# Altium PCB PCB1.PcbDoc
Units mm, origin at the board's own origin, x right, y up, seen from the top; angles counter-clockwise.
Board outline 54.1 x 52.32 mm, 2 copper layers (Top Layer, Bottom Layer); 12 components, 8 nets, 25 pads, 0 vias.
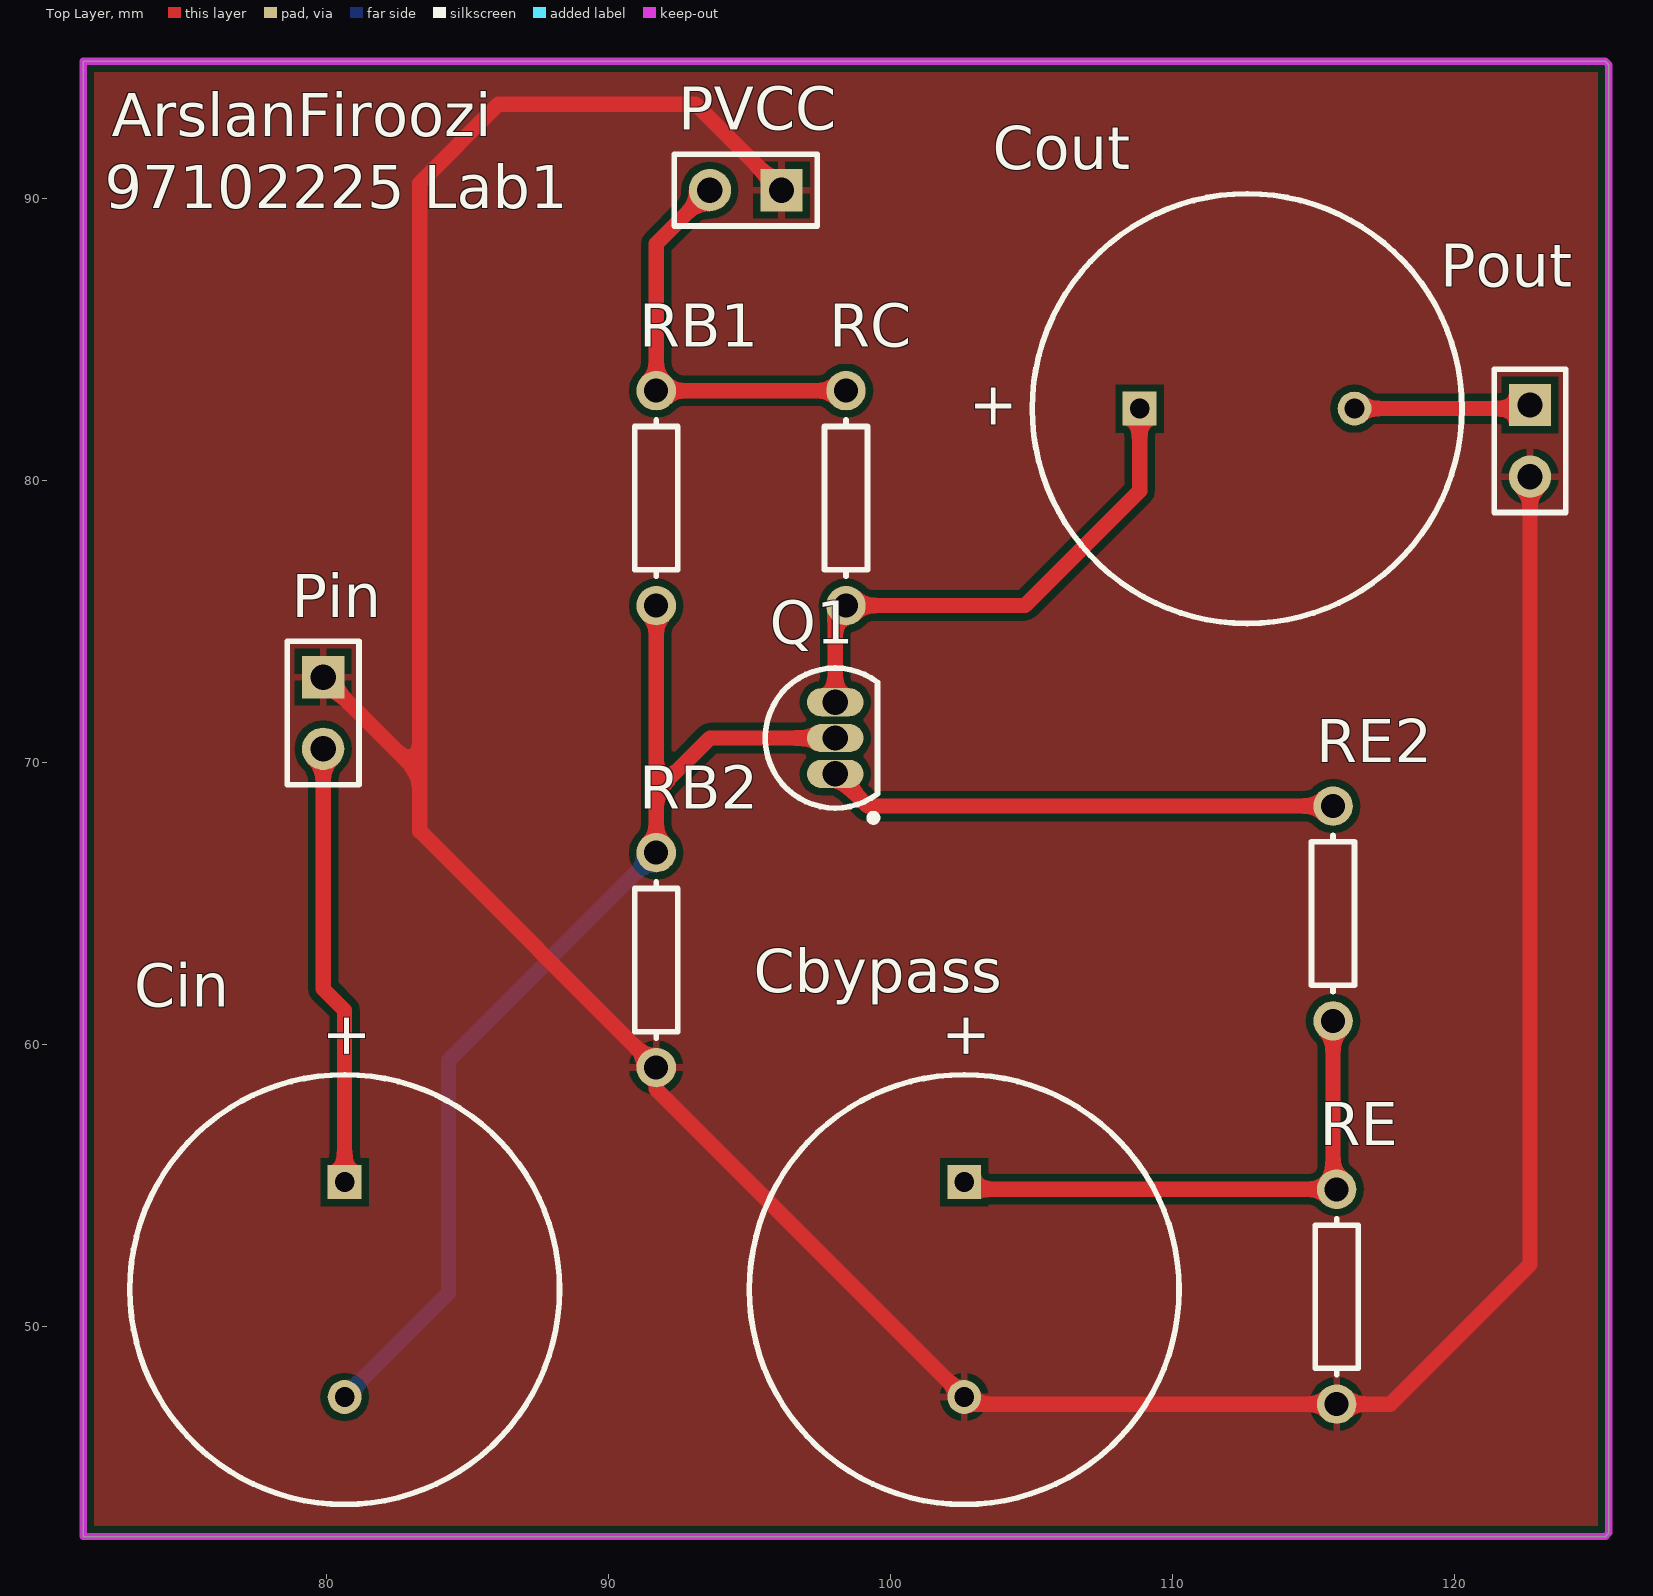
[diagram p0: Top Layer view]
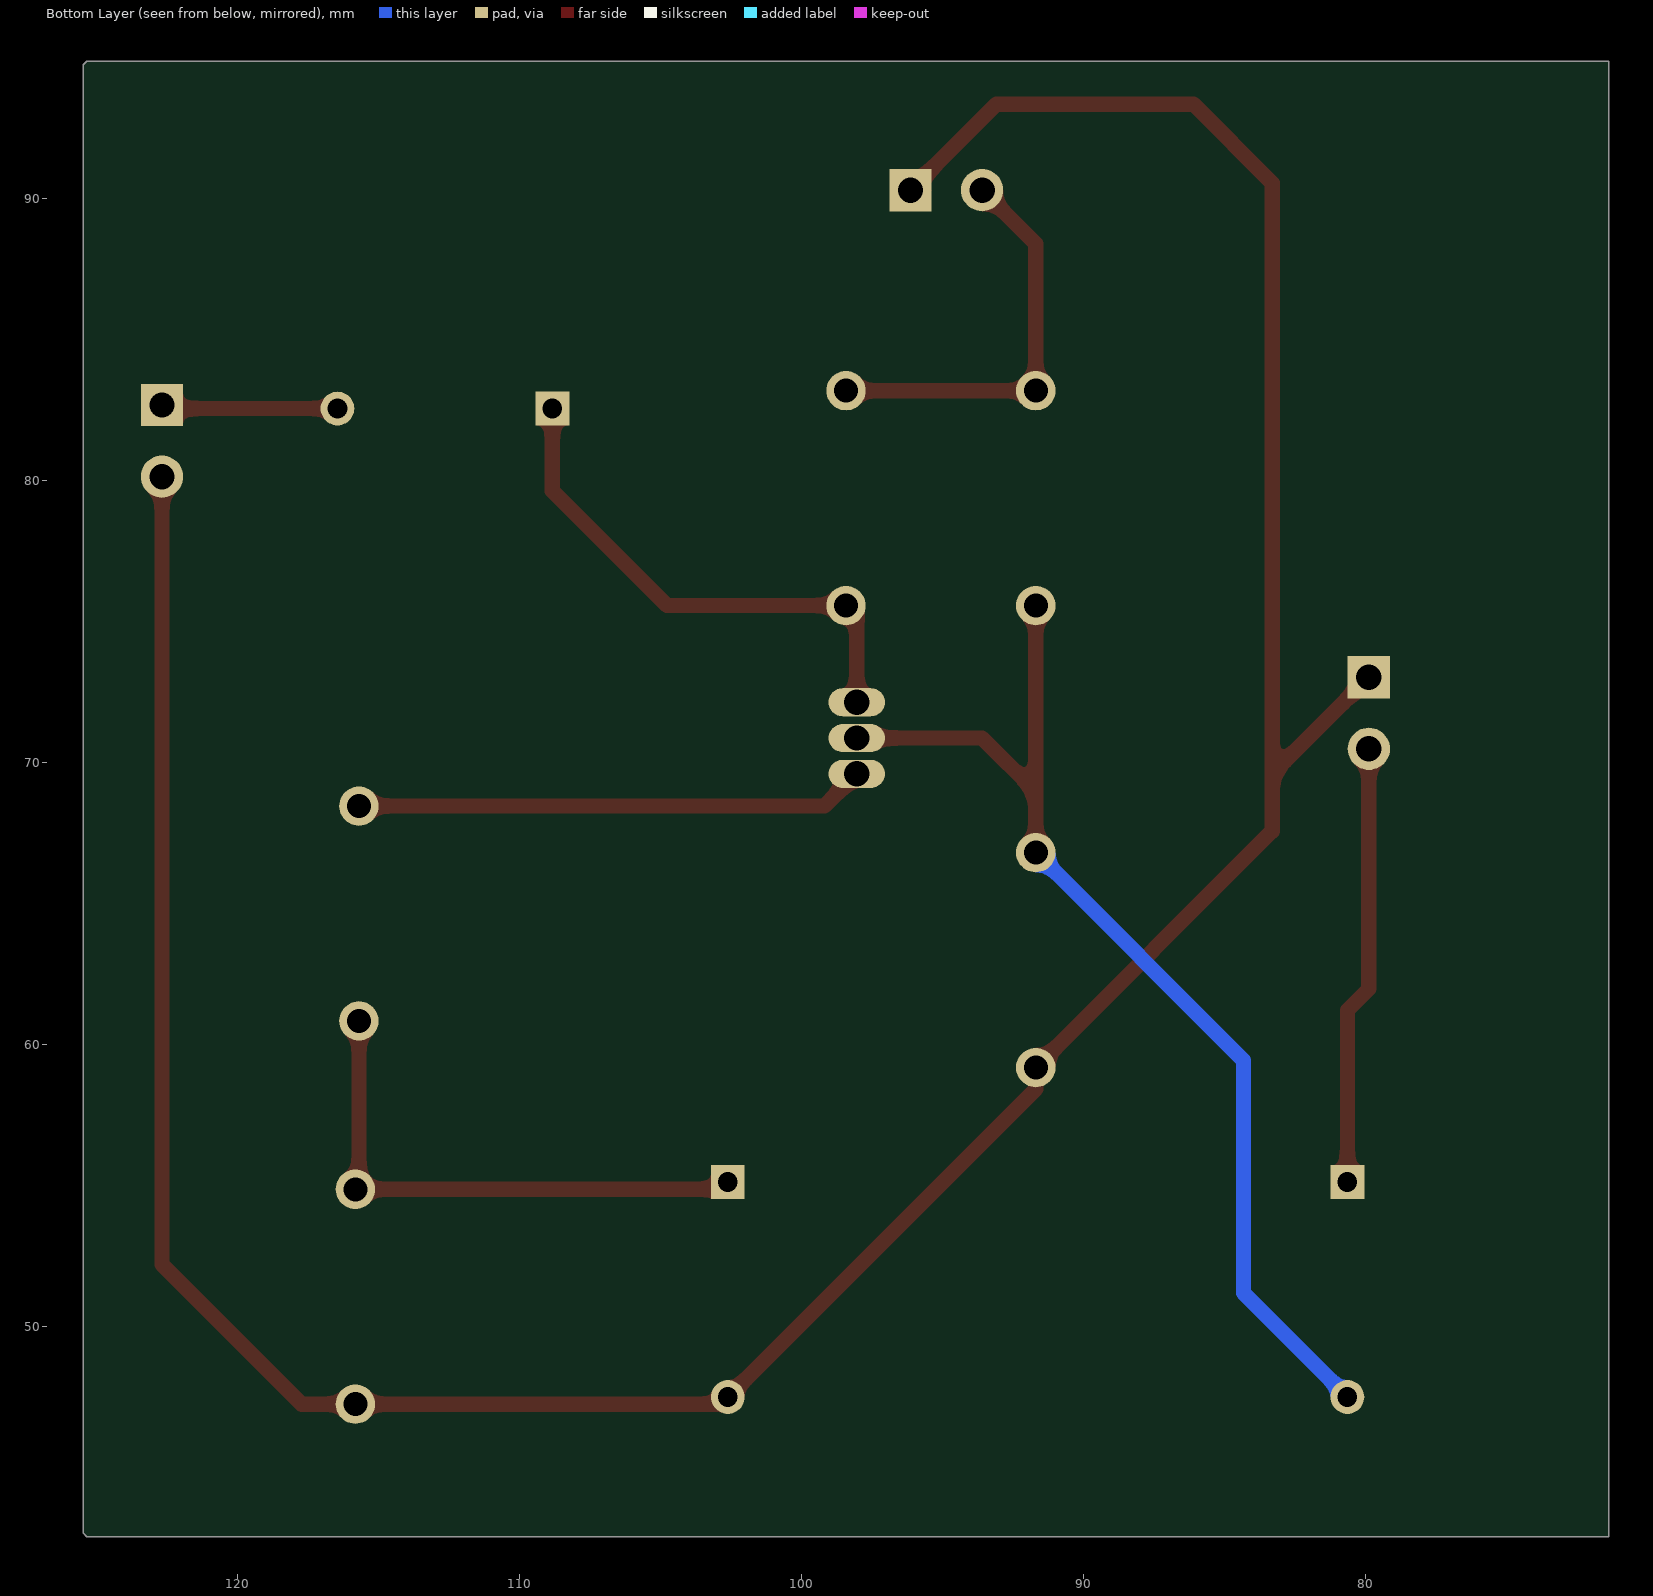
[diagram p1: Bottom Layer view, seen from below]

## Layer stack, top to bottom
Top Solder: solder mask 0.0102, Solder Resist, Dk 3.5
Top Layer: signal copper 0.0356
Dielectric 1: dielectric 0.32, FR-4, Dk 4.8
Bottom Layer: signal copper 0.0356
Bottom Solder: solder mask 0.0102, Solder Resist, Dk 3.5

## Board outline
71.374,42.545 125.349,42.545 125.476,42.672 125.476,94.742 125.349,94.869 71.374,94.869

## Design rules (kind name [scope] priority, off if disabled: settings)
Clearance [All] p1: gap=0.254 ignorepadtopadclearanceinfootprint=FALSE except(0: Arc-Hole Track-Hole SMDPad-Hole THPad-Hole Via-Hole Fill-Hole Poly-Hole Region-Hole Text-Hole)
PolygonConnect [All] p1: connectstyle=Relief reliefconductorwidth=0.254 reliefentries=4 polygonreliefangle="90 Angle" airgapwidth=0.254
RoutingVias [All] p1: holewidth=0.711 width=1.27 viastyle="Through Hole" minholewidth=0.711 minwidth=1.27 maxholewidth=0.711 maxwidth=1.27
SolderMaskExpansion [All] p1: expansion=0.102
Width [All] p1: maxlimit=0.55 minlimit=0.5 preferedwidth=0.54
30 further rules are at their usual default settings.

## Components (designator, comment, footprint, x,y, rotation, side; value= is the part's Value field where it differs from the comment)
Cbypass "Cap Pol1" RB7.6-15 102.616,51.308 r90 top value=100pF
Cin "Cap Pol1" RB7.6-15 80.645,51.308 r90 top value=100pF
Cout "Cap Pol1" RB7.6-15 112.649,82.55 r180 top value=100pF
Pin "Header 2" HDR1X2 79.883,73.025 r270 top
Pout "Header 2" HDR1X2 122.682,82.677 r270 top
PVCC "Header 2" HDR1X2 96.139,90.297 r180 top
Q1 "2N3904" TO-92A 98.044,70.866 r0 top
RB1 "Res1" AXIAL-0.3 91.694,79.375 r90 top value=1K
RB2 "Res1" AXIAL-0.3 91.694,62.992 r90 top value=1K
RC "Res1" AXIAL-0.3 98.425,79.375 r90 top value=1K
RE "Res1" AXIAL-0.3 115.824,51.054 r90 top value=1K
RE2 "Res1" AXIAL-0.3 115.697,64.643 r90 top value=1K

## Footprints (in the part's own frame and the unit in brackets; to place one, negate y for a bottom-side part, rotate by r counter-clockwise, add the part's x,y. Pads: shape width x height; smd on the part's side, far side on the other; paste and mask are expansions set on the pad)
AXIAL-0.3 [mm] "Axial Device, Thru-Hole; 2 Leads; 0.3 in Pin Spacing"
  round 1.4 hole 0.85: 1(-3.81,0) 2(3.81,0)
  silkscreen extent -2.77,-0.76 2.77,0.76
HDR1X2 [mm] "Connector; Header; 2 Position"
  rect 1.5x1.5 hole 0.9: 1(0,0)
  round 1.5 hole 0.9: 2(2.54,0)
  silkscreen extent -1.27,-1.27 3.81,1.27
RB7.6-15 [mm] "Polarized Capacitor (Radial); 2 Leads"
  rect 1.2x1.2 hole 0.7: 1(3.81,0)
  round 1.2 hole 0.7: 2(-3.81,0)
  silkscreen extent -7.62,-7.62 7.62,7.62
TO-92A [mm] "TO, Flat Index; 3 In-Line, Axial Leads; Body Dia. 4.5mm; Leads 0.51 x 0.48 mm (max)"
  oval 2x1 hole 0.9: 1(0,-1.27) 2(0,0) 3(0,1.27)
  silkscreen extent -2.48,-2.95 1.5,2.48, body extent -2.48,-2.5 1.5,2.5, height 6.86

## Part data
Cbypass Cin Cout: "Polarized Capacitor (Radial)", LatestRevisionDate=17-Jul-2002, LatestRevisionNote="Re-released for DXP Platform.", PackageDescription="Polarized Capacitor (Radial); 2 Leads", PackageReference=RB7.6-15, Published=8-Jun-2000, Publisher="Altium Limited"
Pin Pout PVCC: "Header, 2-Pin", LatestRevisionDate=17-Jul-2002, LatestRevisionNote="Re-released for DXP Platform.", Publisher="Altium Limited"
Q1: "NPN General Purpose Amplifier", ComponentLink1Description="Manufacturer Link", ComponentLink1URL=http://www.fairchildsemi.com/, ComponentLink2Description=Datasheet, ComponentLink2URL=http://www.fairchildsemi.com/ds/2N%2F2N3904.pdf, DatasheetVersion=1997, LatestRevisionDate=15-Jan-2003, LatestRevisionNote="PCB Footprint 'BCY-W3/D4.7' replaced", PackageDescription="TO, Flat Index; 3 In-Line, Axial Leads; Body Dia. 4.5mm; Leads 0.51 x 0.48 mm (max)", PackageReference=TO-92A, PackageVersion=Sep-1998, Published=8-Jun-2000, Publisher="Altium Limited"
RB1 RB2 RC RE RE2: "Resistor", LatestRevisionDate=17-Jul-2002, LatestRevisionNote="Re-released for DXP Platform.", PackageDescription="Axial Device, Thru-Hole; 2 Leads; 0.3 in Pin Spacing", PackageReference=AXIAL-0.3, Published=8-Jun-2000, Publisher="Altium Limited"

## Nets (pads, with @x,y where several pads share a name; then routed paths per layer and width w, separated by ;. In a path a pad name is that pad's centre, name@x,y a point inside that pad or via, vN(x,y) a via of type N, cw(c..) or ccw(c..) an arc to the next point about the centre after c; other vN are vias at no path point)
GND: Cbypass.2 Pin.1 Pout.2 PVCC.1 RB2.1 RE.1 | length 121.3
  Top Layer w0.54: Pin.1 83.312,69.596 ; PVCC.1 93.091,93.345 86.106,93.345 83.312,90.551 83.312,69.596 ; Pout.2 122.682,52.197 117.729,47.244 RE.1 102.87,47.244 Cbypass.2 91.694,58.42 RB2.1 83.312,67.564 83.312,69.596
NetCbypass_1: Cbypass.1 RE2.1 RE.2 | length 19.3
  Top Layer w0.54: Cbypass.1 102.87,54.864 RE.2 115.697,54.991 RE2.1
NetCin_1: Cin.1 Pin.2 | length 15.7
  Top Layer w0.54: Pin.2 79.883,61.976 80.645,61.214 Cin.1
NetCin_2: Cin.2 Q1.2 RB1.1 RB2.2 | length 39.8
  Top Layer w0.54: RB2.2 91.694,68.961 ; RB1.1 91.694,68.961 ; Q1.2 93.599,70.866 91.694,68.961
  Bottom Layer w0.54: Cin.2 84.328,51.181 84.328,59.436 RB2.2
NetCout_1: Cout.1 Q1.3 RC.1 | length 19.1
  Top Layer w0.254: Q1.3 Q1.3@98.425,72.517
  Top Layer w0.54: Q1.3 98.044,75.184 RC.1 104.775,75.565 108.839,79.629 Cout.1
NetCout_2: Cout.2 Pout.1 | length 6.3
  Top Layer w0.54: Cout.2 122.555,82.55 Pout.1
NetPVCC_2: PVCC.2 RB1.2 RC.2 | length 14.6
  Top Layer w0.54: PVCC.2 91.694,88.392 RB1.2 RC.2
NetQ1_1: Q1.1 RE2.2 | length 18.1
  Top Layer w0.54: Q1.1 99.187,68.453 RE2.2

## Polygon pours and split planes (outlines as drawn)
GND on Top Layer "GND_L01_P000" (solid, pour order 0): 71.374,42.545 71.374,94.869 125.349,94.869 125.349,42.545

## Keep-outs
Top Layer:
  the board outline again, w0.254

## Silkscreen, mask and mechanical layers (free items; w line width, h text height)
Top Overlay:
  text "ArslanFiroozi" at 72.39,92.202 h1.52
  text "97102225 Lab1" at 72.136,89.662 h1.52

## Text inside footprints (layer, text, board x,y; h text height)
Cbypass: Top Overlay "+" at 103.353,59.44 h1.5 r90
Cin: Top Overlay "+" at 81.382,59.44 h1.5 r90
Cout: Top Overlay "+" at 104.517,83.287 h1.5 r180